# EAGLE board BikeLight (EAGLE 9.5.1)
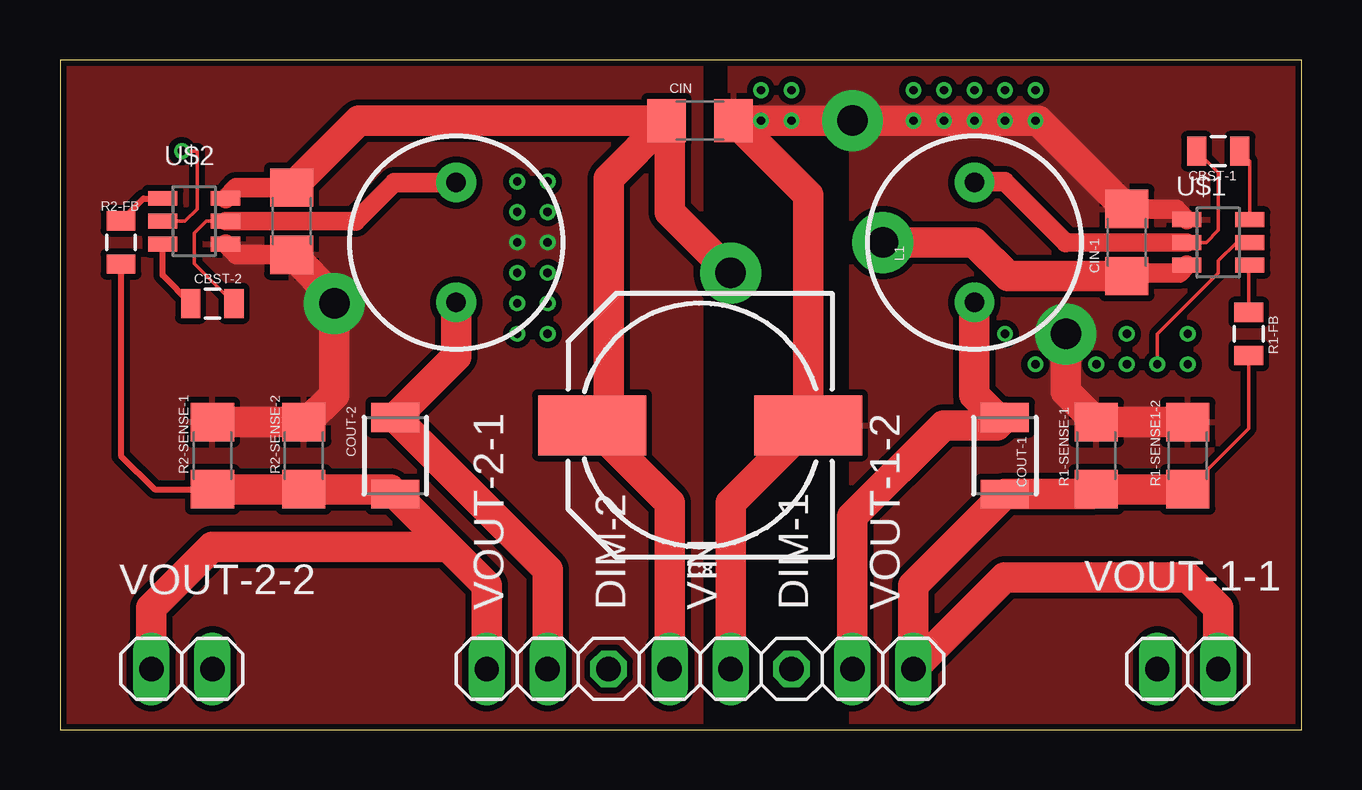
[diagram p0: board, top side]
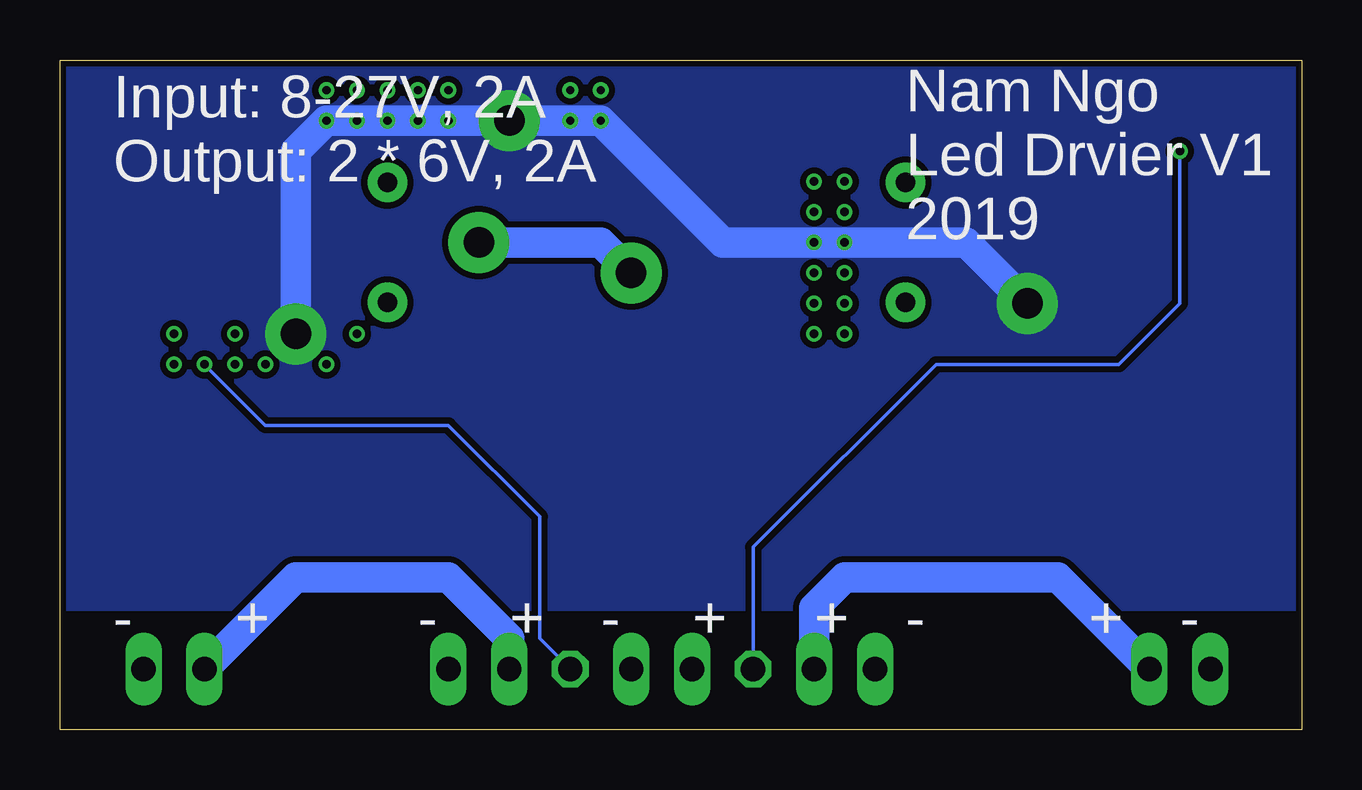
[diagram p1: board, bottom side, seen from below]

Size 51.74 x 27.93 mm. Coordinates in mm from the lower left corner, seen from the top.
Outline: 0,0 51.74,0 51.74,27.93 0,27.93 0,0
Copper layers (1*16): Top 0.035mm / dielectric 1.5mm / Bottom 0.035mm
Design rules "dirt_cheap_dirty_boards.v1.1": minimum track width 6mil, minimum drill 12mil, track to track 6mil, track to pad 6mil, pad to pad 6mil, via to via 6mil, smd to smd 0mil, copper to edge 10mil, drill to drill 10mil, minimum pad ring 10mil, minimum via ring 6mil, stop-mask expansion 2mil, vias tented up to drill 25mil, thermal gap 10mil

## Footprints (pad centres in the part's own frame; a part is rotated, then mirrored left to right if it is on the bottom)
NIC_10X10.5_CAP = smd 4.5 x 2.5: + 4.5,0; - -4.5,0
0805 = smd 0.8 x 1.2: 1 -0.9,0; 2 0.9,0
1206 = smd 1.6 x 1.8: 1 -1.4,0; 2 1.4,0
1210 = smd 1.2 x 2: 1 -1.6,0; 2 1.6,0
1X01 = drill 1.016 octagon: 1 0,0
RLB0912 = drill 0.813 pad 1.651: 1 2.502,0; 2 -2.502,0
TSOT23-6 = smd 0.622 x 1.22: 1 -0.95,-1.31; 2 0,-1.31; 3 0.95,-1.31; 4 0.95,1.31; 5 0,1.31; 6 -0.95,1.31
1X02 = drill 1.016 long: 1 -1.27,0; 2 1.27,0

## Placement (x,y rotation side)
C8  100uF  [NIC_10X10.5_CAP]  26.67,12.7 180 top
CBST-1  10nF  [0805]  48.26,24.13 180 top
CBST-2  10nF  [0805]  6.35,17.78 0 top
CIN  4.7uf  [1206]  26.67,25.4 0 top
CIN-1  4.7uf  [1206]  44.45,20.32 90 top
CIN-2  4.7uf  [1206]  9.65,21.21 270 top
COUT-1  10uf  [1210]  39.37,11.43 270 top
COUT-2  10uf  [1210]  13.97,11.43 270 top
DIM-1  [1X01]  30.48,2.54 0 top
DIM-2  [1X01]  22.86,2.54 0 top
L1  4.7uf  [RLB0912]  38.1,20.32 90 top
L2  4.7uf  [RLB0912]  16.51,20.32 90 top
R1-FB  1k  [0805]  49.53,16.51 270 top
R1-SENSE1-2  200mO  [1206]  46.99,11.43 90 top
R1-SENSE-1  100mO  [1206]  43.18,11.43 90 top
R2-FB  1k  [0805]  2.54,20.32 270 top
R2-SENSE-1  100mO  [1206]  6.35,11.43 270 top
R2-SENSE-2  200mO  [1206]  10.16,11.43 270 top
U$1  MP2410  [TSOT23-6]  48.26,20.32 270 top
U$2  MP2410  [TSOT23-6]  5.59,21.21 90 top
VIN  [1X02]  26.67,2.54 180 top
VOUT-1-1  [1X02]  46.99,2.54 180 top
VOUT-1-2  [1X02]  34.29,2.54 180 top
VOUT-2-1  [1X02]  19.05,2.54 0 top
VOUT-2-2  [1X02]  5.08,2.54 0 top

## Library data of the parts
C8 = SparkFun-Capacitors; PROD_ID: CAP-08362
CBST-1 CBST-2 CIN CIN-1 CIN-2 COUT-1 COUT-2 L1 L2 R1-FB R1-SENSE1-2 R1-SENSE-1 R2-FB R2-SENSE-1 R2-SENSE-2 = SparkFun-Passives
DIM-1 DIM-2 VIN VOUT-1-1 VOUT-1-2 VOUT-2-1 VOUT-2-2 = pinhead
U$1 U$2 = CustomParts

## Nets
+12V: C8.+ CIN-1.1 CIN-2.1 CIN.1 U$1.3 U$2.3 VIN.2
GND: C8.- CIN-1.2 CIN-2.2 CIN.2 R1-SENSE1-2.2 R1-SENSE-1.2 R2-SENSE-1.1 R2-SENSE-2.1 U$1.1 U$2.1 VIN.1
N$1: DIM-2.1 U$2.5
N$2: DIM-1.1 U$1.5
N$3: CBST-1.2 L1.1 U$1.2
N$5: CBST-2.2 L2.1 U$2.2
N$7: CBST-1.1 U$1.6
N$8: R1-FB.1 U$1.4
N$10: R2-FB.1 U$2.4
N$11: CBST-2.1 U$2.6
N-OUT-1-N: COUT-1.2 R1-FB.2 R1-SENSE1-2.1 R1-SENSE-1.1 VOUT-1-1.1 VOUT-1-2.1
N-OUT-1-P: COUT-1.1 L1.2 VOUT-1-1.2 VOUT-1-2.2
N-OUT-2-N: COUT-2.2 R2-FB.2 R2-SENSE-1.2 R2-SENSE-2.2 VOUT-2-1.1 VOUT-2-2.1
N-OUT-2-P: COUT-2.1 L2.2 VOUT-2-1.2 VOUT-2-2.2

## Tracks (layer width: path | path; a pad name or v marks a point on that pad's centre or on a via)
+12V  (via drill 1.27 pad 2.54)
  Top 0.813: U$2.3 7.35,22.61 CIN-2.1 | CIN-1.1 44.58,19.05 46.63,19.05 U$1.3
  Top 1.27: VIN.2 25.4,9.47 C8.+ 22.86,13.39 22.86,22.99 CIN.1 | CIN.1 12.44,25.4 CIN-2.1 | CIN.1 25.4,25.27 25.4,21.59 v27.94,19.05 | v34.29,20.32 38.1,20.32 39.5,18.92 CIN-1.1
  Bottom 1.27: v27.94,19.05 29.21,20.32 v34.29,20.32
GND  (via drill 0.35, 1.27 pad 2.54)
  Top 0.813: U$2.1 7.35,19.81 CIN-2.2 | U$1.1 46.5,21.72 CIN-1.2
  Top 1.27: VIN.1 27.94,9.47 C8.- 31.17,22.3 CIN.2 v29.21,25.4 v30.48,25.4 v33.02,25.4 v35.56,25.4 v36.83,25.4 v38.1,25.4 v39.37,25.4 v40.64,25.4 40.77,25.4 CIN-1.2 | CIN-2.2 11.43,18.03 v11.43,17.78 11.43,13.97 10.29,12.83 R2-SENSE-2.1 R2-SENSE-1.1 | R1-SENSE1-2.2 R1-SENSE-1.2 41.91,14.1 v41.91,16.51
  Bottom 1.27: v11.43,17.78 13.97,20.32 v19.05,20.32 v20.32,20.32 24.13,20.32 v29.21,25.4 v30.48,25.4 v33.02,25.4 v35.56,25.4 v36.83,25.4 v38.1,25.4 v39.37,25.4 v40.64,25.4 41.91,24.13 v41.91,16.51
  pour Top (isolate 0.254): 26.67,27.94 26.67,0 0,0 0,27.94
  pour Top (isolate 0.254): 33.02,0 33.02,24.13 31.75,25.4 27.94,25.4 27.94,27.94 52.07,27.94 52.07,0
  pour Bottom (isolate 0.254): 0,27.94 50.8,27.94 52.07,27.94 52.07,5.08 0,5.08
N$1  (via drill 0.35)
  Top 0.152: U$2.5 5.21,21.21 5.71,21.72 5.71,24.13 v5.08,24.13
  Bottom 0.152: v5.08,24.13 5.08,17.78 7.62,15.24 15.24,15.24 22.86,7.62 DIM-2.1
N$2  (via drill 0.35)
  Top 0.152: v45.72,15.24 45.72,16.51 48.26,19.05 48.26,19.56 49.02,20.32 U$1.5
  Bottom 0.152: DIM-1.1 31.75,3.81 31.75,8.89 35.56,12.7 43.18,12.7 v45.72,15.24
N$3
  Top 0.152: CBST-1.2 48.26,23.23 48.26,20.83 47.75,20.32 U$1.2
  Top 0.762: U$1.2 41.91,20.32
  Top 0.813: 41.91,20.32 39.37,22.86 38.14,22.86 L1.1
N$4  (via drill 0.35)
  other vias: 20.32,22.86
N$5
  Top 0.152: U$2.2 6.1,21.21 5.59,20.7 5.59,19.44 CBST-2.2
  Top 0.762: U$2.2 12.32,21.21
  Top 0.813: 12.32,21.21 13.93,22.82 L2.1
N$6  (via drill 0.35)
  other vias: 20.32,21.59
N$7
  Top 0.152: U$1.6 49.57,23.72 CBST-1.1
N$8
  Top 0.152: R1-FB.1 49.53,19.33 U$1.4
N$9  (via drill 0.35)
  other vias: 20.32,19.05
N$10
  Top 0.254: R2-FB.1 3.48,22.16 U$2.4
N$11
  Top 0.254: CBST-2.1 4.28,18.95 U$2.6
N$12  (via drill 0.35)
  other vias: 19.05,19.05
N$13  (via drill 0.35)
  other vias: 19.05,21.59
N$14  (via drill 0.35)
  other vias: 19.05,22.86
N$15  (via drill 0.35)
  other vias: 30.48,26.67
N$16  (via drill 0.35)
  other vias: 35.56,26.67
N$17  (via drill 0.35)
  other vias: 38.1,26.67
N$18  (via drill 0.35)
  other vias: 36.83,26.67
N$19  (via drill 0.35)
  other vias: 39.37,26.67
N$20  (via drill 0.35)
  other vias: 40.64,26.67
N$21  (via drill 0.35)
  other vias: 29.21,26.67
N$22  (via drill 0.35)
  other vias: 40.64,15.24
N$23  (via drill 0.35)
  other vias: 43.18,15.24
N$24  (via drill 0.35)
  other vias: 44.45,16.51
N$25  (via drill 0.35)
  other vias: 44.45,15.24
N$26  (via drill 0.35)
  other vias: 46.99,15.24
N$27  (via drill 0.35)
  other vias: 46.99,16.51
N$28  (via drill 0.35)
  other vias: 39.37,16.51
N$29  (via drill 0.35)
  other vias: 19.05,17.78
N$30  (via drill 0.35)
  other vias: 20.32,17.78
N$31  (via drill 0.35)
  other vias: 20.32,16.51
N$32  (via drill 0.35)
  other vias: 19.05,16.51
N-OUT-1-N
  Top 0.152: R1-SENSE1-2.1 49.53,12.57 R1-FB.2
  Top 1.27: R1-SENSE1-2.1 R1-SENSE-1.1 42.98,9.83 COUT-1.2 35.56,6.02 VOUT-1-2.1 39.37,6.35 46.99,6.35 48.26,5.08 VOUT-1-1.1
N-OUT-1-P
  Top 1.27: L1.2 38.1,13.97 39.04,13.03 COUT-1.1 39.04,12.7 36.83,12.7 33.02,8.89 VOUT-1-2.2
  Bottom 1.27: VOUT-1-1.2 41.91,6.35 35.56,6.35 33.02,3.81 VOUT-1-2.2
N-OUT-2-N
  Top 0.254: R2-FB.2 2.54,11.43 3.94,10.03 R2-SENSE-1.2
  Top 1.27: 16.18,7.62 COUT-2.2 13.77,10.03 R2-SENSE-2.2 R2-SENSE-1.2 | 16.18,7.62 17.78,6.02 VOUT-2-1.1 | VOUT-2-2.1 3.81,5.08 6.35,7.62 16.18,7.62
N-OUT-2-P
  Top 1.27: L2.2 16.51,15.57 COUT-2.1 20.32,6.68 VOUT-2-1.2
  Bottom 1.27: VOUT-2-1.2 20.32,5.08 19.05,6.35 10.16,6.35 VOUT-2-2.2

## Text on the board
bPlace: Input: 8-27V, 2A / Output: 2 * 6V, 2A | Nam Ngo / Led Drvier V1 / 2019 | - | + | - | + | + | - | + | - | + | -